# Altium PCB PortSwitcher1D.PCBDOC (part 4 of 4)
Units mil, origin at the board's own origin, x right, y up, seen from the top; angles counter-clockwise.
Board outline 6005.03 x 6005.03 mil, 4 copper layers (Top Layer, InternalPlane1, InternalPlane2, Bottom Layer); 153 components, 325 nets, 1175 pads, 173 vias.
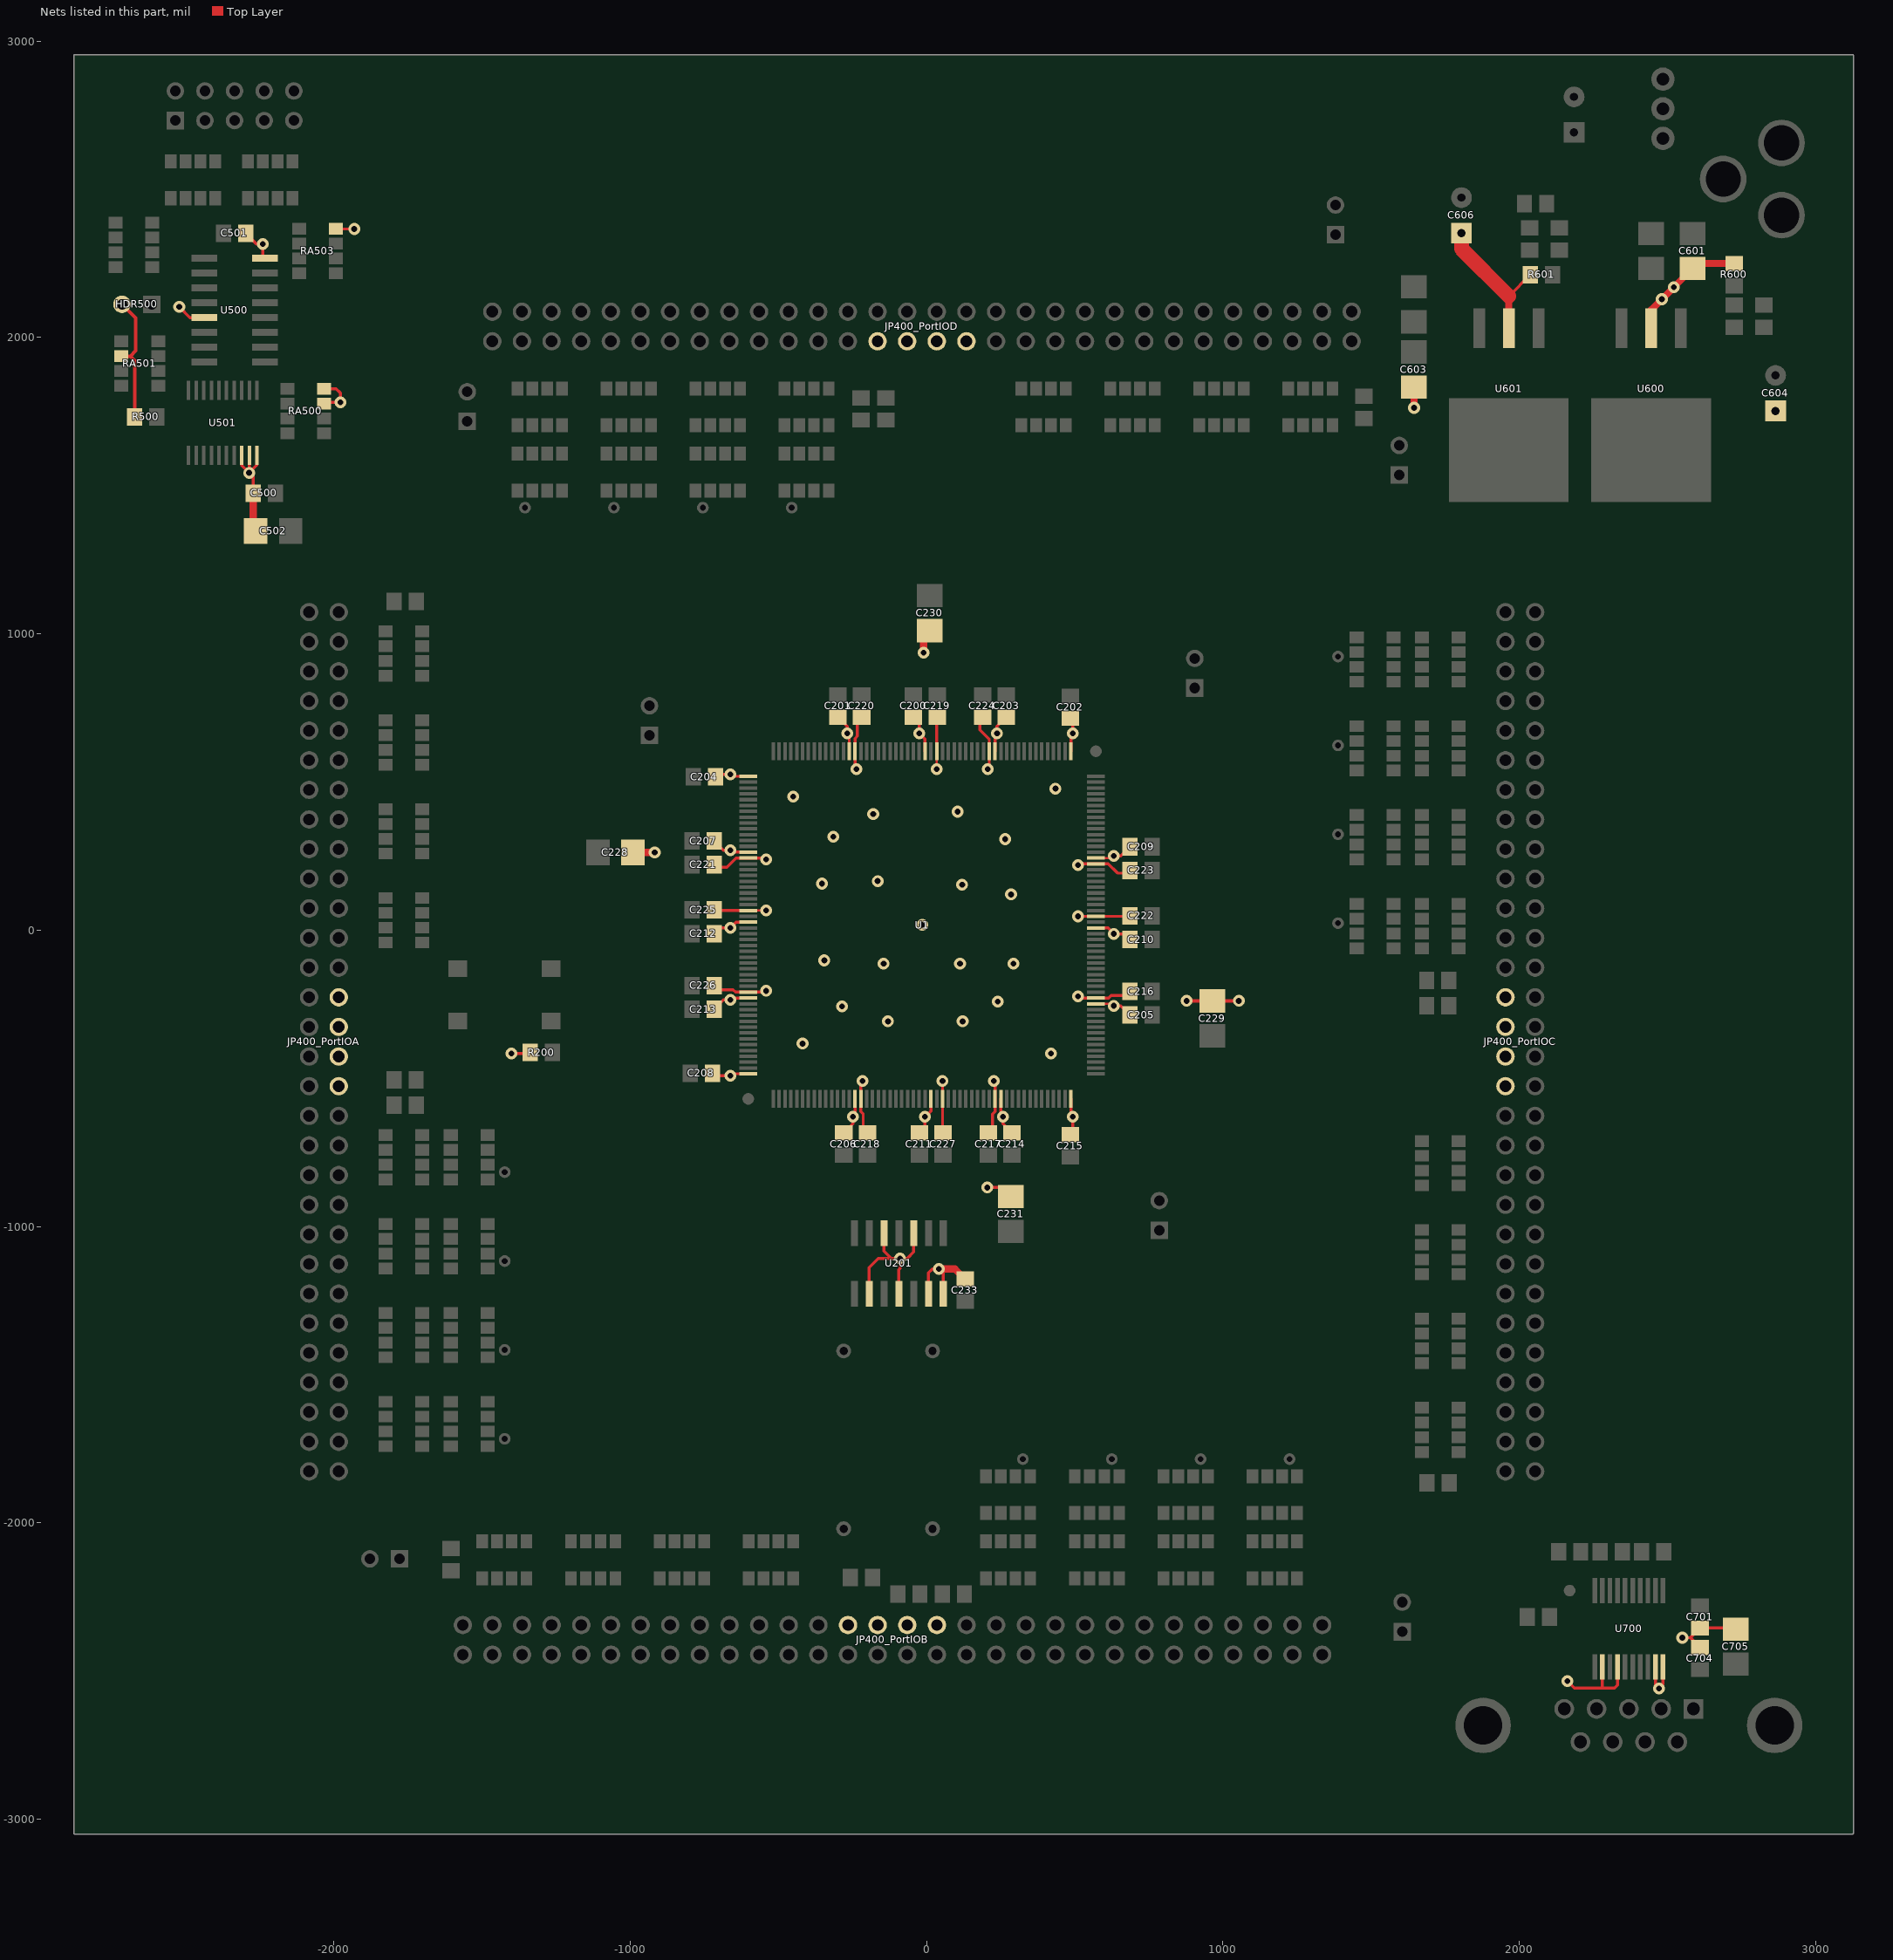
[diagram p6: the nets of this part, all layers, seen from the top]

## Via types
v1: diameter 40, hole 19.68, Top Layer to Bottom Layer, 173 vias

## Nets (pads, with @x,y where several pads share a name; then routed paths per layer and width w, separated by ;. In a path a pad name is that pad's centre, name@x,y a point inside that pad or via, vN(x,y) a via of type N, cw(c..) or ccw(c..) an arc to the next point about the centre after c; other vN are vias at no path point) (continued)
VCCINT: C216.1 C217.1 C218.1 C219.1 C220.1 C221.1 C222.2 C223.2 C224.2 C225.2 C226.2 C227.2 C230.1 C231.1 C603.1 C606.1 R601.2 U1.14 U1.28 U1.37 U1.67 U1.76 U1.90 U1.119 U1.128 U1.142 U1.172 U1.186 U1.195 U601.2 | length 4663.1
  Top Layer w8: U1.128@-601.88,66.5 v1(-541.37,66.5) U1.128@-601.88,66.5 ; v1(33.95,543.45) U1.76@33.95,603.91 v1(33.95,543.45) ; U1.186@53.63,-569.32 v1(53.63,-508.81) U1.186@53.63,-569.32 ; v1(510.84,46.82) U1.28@571.35,46.82 v1(510.84,46.82)
  Top Layer w10: C226.2@-717.86,-172.71 C226.2@-717.86,-177.12 ; C221.1@-712.86,212.29 -674.55,212.29 -643.17,243.67 ; C220.1@-205.26,719.89 C220.1@-209.67,719.89 ; C218.1@-185.58,-685.31 C218.1@-189.99,-685.31 ; C224.2@179.74,714.89 179.74,676.58 211.11,645.2 ; C217.1@194.42,-685.31 198.83,-685.31 C217.1@204.13,-680.01 ; v1(204.22,-868.54) 254.62,-868.53 C231.1@284.74,-898.65 ; C223.2@682.33,192.61 644.02,192.61 612.64,223.99 ; C216.1@687.33,-192.39 C216.1@687.33,-196.8 ; 1964.74,2139.69 R601.2@2037.33,2212.29 ; C226.2@-717.86,-177.12 C226.2@-712.57,-182.41 ; C226.2@-717.86,-177.12 C226.2@-712.57,-182.41 ; C226.2@-712.57,-182.41 C226.2@-693.89,-201.09 ; C226.2@-712.57,-182.41 C226.2@-693.89,-201.09 ; C225.2@-710.36,74.79 C225.2@-702.07,66.5 ; C225.2@-710.36,74.79 -717.86,82.29 C225.2@-710.36,74.79 ; C225.2@-710.36,74.79 C225.2@-702.07,66.5 ; C225.2@-702.07,66.5 U1.128@-601.88,66.5 C225.2@-702.07,66.5 ; C226.2@-693.89,-201.09 -652.88,-201.09 -644.89,-209.09 ; -644.89,-209.09 U1.142@-601.88,-209.09 ; -644.89,-209.09 U1.142@-601.88,-209.09 ; -643.17,243.67 U1.119@-601.88,243.67 ; -643.17,243.67 U1.119@-601.88,243.67 ; U1.142@-601.88,-209.09 v1@-545.8,-209.09 ; U1.142@-601.88,-209.09 v1@-545.8,-209.09 ; U1.119@-601.88,243.67 v1@-546.61,243.67 ; U1.119@-601.88,243.67 v1@-546.61,243.67 ; v1@-546.61,243.67 v1(-541.39,238.45) v1@-546.61,243.67 ; v1@-545.8,-209.09 v1(-541.39,-204.68) v1@-545.8,-209.09 ; v1@-241.64,547.83 v1(-237.23,543.42) v1@-241.64,547.83 ; v1@-241.64,547.83 U1.90@-241.64,603.91 ; v1@-241.64,547.83 U1.90@-241.64,603.91 ; U1.90@-241.64,603.91 -241.64,646.92 ; U1.90@-241.64,603.91 -241.64,646.92 ; -241.64,646.92 -233.65,654.91 C220.1@-233.65,695.91 ; C220.1@-233.65,695.91 C220.1@-214.97,714.59 ; C220.1@-233.65,695.91 C220.1@-214.97,714.6 ; -221.96,-612.34 -213.96,-620.33 -213.96,-661.33 -199.58,-675.72 C218.1@-195.28,-680.01 ; -221.96,-612.34 U1.172@-221.96,-569.32 ; -221.96,-612.34 U1.172@-221.96,-569.32 ; U1.172@-221.96,-569.32 v1@-221.96,-514.05 ; U1.172@-221.96,-569.32 v1@-221.96,-514.05 ; v1@-221.96,-514.05 v1(-216.74,-508.83) v1@-221.96,-514.05 ; C220.1@-214.97,714.59 C220.1@-209.67,719.89 ; C220.1@-214.97,714.6 C220.1@-209.67,719.89 ; C218.1@-195.28,-680.01 C218.1@-189.99,-685.31 ; C218.1@-195.28,-680.01 C218.1@-189.99,-685.31 ; C219.1@33.95,704.1 U1.76@33.95,603.91 C219.1@33.95,704.1 ; C219.1@33.95,704.1 C219.1@42.24,712.39 ; C219.1@33.95,704.1 C219.1@42.24,712.39 ; C219.1@42.24,712.39 49.74,719.89 C219.1@42.24,712.39 ; C227.2@53.63,-669.52 55.42,-671.31 C227.2@61.92,-677.81 ; C227.2@53.63,-669.52 U1.186@53.63,-569.32 C227.2@53.63,-669.52 ; C227.2@53.63,-669.52 C227.2@61.92,-677.81 ; C227.2@61.92,-677.81 69.42,-685.31 C227.2@61.92,-677.81 ; C217.1@204.13,-680.01 208.42,-675.72 C217.1@222.81,-661.33 ; C217.1@204.13,-680.01 C217.1@222.81,-661.33 ; v1@211.11,548.64 v1(205.89,543.42) v1@211.11,548.64 ; v1@211.11,548.64 U1.67@211.11,603.91 ; v1@211.11,548.64 U1.67@211.11,603.91 ; U1.67@211.11,603.91 211.11,645.2 ; U1.67@211.11,603.91 211.11,645.2 ; C217.1@222.81,-661.33 222.81,-620.33 230.8,-612.34 ; 230.8,-612.34 U1.195@230.8,-569.32 ; 230.8,-612.34 U1.195@230.8,-569.32 ; U1.195@230.8,-569.32 v1@230.8,-513.24 ; U1.195@230.8,-569.32 v1@230.8,-513.24 ; v1@230.8,-513.24 v1(226.39,-508.83) v1@230.8,-513.24 ; v1@515.27,223.98 v1(510.86,219.57) v1@515.27,223.98 ; v1@515.27,223.98 U1.37@571.35,223.98 ; v1@515.27,223.98 U1.37@571.35,223.98 ; v1@516.08,-228.77 v1(510.86,-223.55) v1@516.08,-228.77 ; v1@516.08,-228.77 U1.14@571.35,-228.77 ; v1@516.08,-228.77 U1.14@571.35,-228.77 ; U1.14@571.35,-228.77 614.36,-228.77 ; U1.14@571.35,-228.77 614.36,-228.77 ; U1.37@571.35,223.98 612.64,223.99 ; U1.37@571.35,223.98 612.64,223.99 ; 614.36,-228.77 622.36,-220.78 C216.1@663.36,-220.78 ; C216.1@663.36,-220.78 C216.1@682.04,-202.1 ; C216.1@663.36,-220.78 C216.1@682.04,-202.1 ; C216.1@682.04,-202.1 C216.1@687.33,-196.8 ; C216.1@682.04,-202.1 C216.1@687.33,-196.8 ; U1.28@571.35,46.82 671.55,46.82 U1.28@571.35,46.82
  Top Layer w24: v1(-10.34,936.35) -10.34,1013.16 C230.1@-10.26,1013.24 ; v1(1644.74,1762.91) C603.1@1644.74,1833.24 ; U601.2@1964.74,2032.29 1964.74,2139.69
  Top Layer w50: C606.1@1804.74,2352.29 1804.74,2299.69 1964.74,2139.69
  other v1: 419.74,-415.67 -418.7,-382.71 -130.39,-307.71 121.51,-307.71 -285.26,-257.24 239.74,-240.52 -145.15,-112.71 112.66,-112.71 292.73,-112.71 -345.26,-101.77 -15.26,18.28 284.74,120.61 119.74,153.08 -352.78,157.29 -165.26,165.88 265.18,307.29 -315.26,315.44 -180.26,392.2 104.74,400.07 -450.26,451.24 434.74,477.8
VCCO: C200.1 C201.1 C202.1 C203.1 C204.1 C205.1 C206.1 C207.1 C208.2 C209.2 C210.2 C211.2 C212.2 C213.2 C214.2 C215.2 C228.1 C229.1 C233.1 C500.1 C501.1 C502.1 C601.1 C604.1 C701.1 C704.1 C705.1 HDR500.2 JP400_PortIOA.28 JP400_PortIOA.30 JP400_PortIOA.32 JP400_PortIOA.34 JP400_PortIOB.28 JP400_PortIOB.30 JP400_PortIOB.32 JP400_PortIOB.34 JP400_PortIOC.28 JP400_PortIOC.30 JP400_PortIOC.32 JP400_PortIOC.34 JP400_PortIOD.28 JP400_PortIOD.30 JP400_PortIOD.32 JP400_PortIOD.34 pad.0 R200.2 R500.1 R600.2 RA500.7 RA500.8 RA501.6 RA503.8 U1.13 U1.26 U1.38 U1.53 U1.66 U1.78 U1.91 U1.105 U1.118 U1.130 U1.143 U1.156 U1.171 U1.184 U1.196 U1.208 U201.3 U201.5 U201.9 U201.11 U201.13 U201.14 U500.5 U500.16 U501.18 U501.19 U501.20 U600.2 U700.12 U700.14 U700.19 U700.20 | length 7901
  Top Layer w8: v1@-254.28,-632.31 -250.07,-628.1 v1@-244.28,-622.31 ; -241.64,-604.68 U1.171@-241.64,-569.32 ; v1@253.12,-622.31 v1@258.91,-628.1 ; v1@-660.65,-237.19 -661.17,-237.71 -662.39,-238.93 -664.22,-240.76 -664.87,-241.41 v1@-660.65,-237.19 ; v1@-660.65,-237.19 -654.87,-231.41 v1@-660.65,-237.19 ; v1@-269.75,662.68 -263.97,656.9 v1@-269.75,662.68 ; v1@-269.75,662.68 -273.97,666.9 v1@-269.75,662.68 ; v1@258.91,-628.1 263.12,-632.31 v1@258.91,-628.1 ; v1@625.18,-248.46 U1.13@571.35,-248.46 v1@625.18,-248.46 ; v1@625.18,-248.46 631.86,-248.46 v1@625.18,-248.46 ; v1@625.18,243.67 U1.38@571.35,243.67 v1@625.18,243.67 ; v1@625.18,243.67 631.86,243.67 v1@625.18,243.67 ; v1@630.12,-256.88 634.34,-261.09 v1@630.12,-256.88 ; v1@630.12,-256.88 626.74,-253.49 624.34,-251.09 v1@630.12,-256.88 ; -637.23,-228.77 U1.143@-601.88,-228.77 -637.23,-228.77 ; U1.91@-261.33,603.91 -261.33,639.26 U1.91@-261.33,603.91
  Top Layer w10: v1(-2521.99,2103.79) -2485.49,2067.29 U500.5@-2437.63,2067.29 ; U501.18@-2311.29,1603.04 -2311.29,1568.43 v1(-2286.34,1543.48) ; C501.1@-2297.86,2352.29 -2261.49,2315.92 v1(-2240.09,2315.92) -2240.09,2274.48 U500.16@-2232.9,2267.29 ; U501.19@-2285.7,1603.04 v1@-2285.7,1544.11 ; C500.1@-2272.67,1475.08 -2272.67,1529.81 v1(-2286.34,1543.48) ; U501.20@-2260.11,1603.04 -2260.11,1569.71 v1@-2285.7,1544.11 ; RA500.8@-2033.26,1827.29 -1992.54,1827.29 -1978.34,1813.09 v1(-1978.34,1781.6) RA500.7@-2028.95,1781.6 ; RA503.8@-1992.49,2366.52 v1(-1931.59,2366.52) ; v1(-1401.22,-416.23) -1341.19,-416.23 R200.2@-1337.67,-412.71 ; C206.1@-279.58,-684.31 -248.33,-653.05 v1(-248.33,-629.83) -241.64,-623.15 U1.171@-241.64,-569.32 ; U201.9@-194,-1226.8 -194,-1138.56 -162.86,-1107.42 -65.45,-1107.42 -44,-1085.98 U201.3@-44,-1022.08 ; U201.5@-144,-1022.08 -144,-1082.98 -119.57,-1107.42 ; U201.11@-94,-1226.8 -94,-1145.82 -90.05,-1141.86 pad.0@-90.05,-1107.42 ; U201.13@6,-1226.8 6,-1157.01 19.86,-1143.14 v1(40.84,-1143.14) 56,-1158.3 U201.14@56,-1226.8 ; v1(2161.85,-2533.8) 2185.46,-2557.42 2321.26,-2557.42 2331.35,-2547.32 U700.14@2331.35,-2486.65 ; 2280.17,-2557.18 U700.12@2280.17,-2486.65 ; U700.19@2459.3,-2486.65 2459.3,-2546.82 v1(2471.3,-2558.82) 2484.89,-2545.23 U700.20@2484.89,-2486.65 ; v1(2550.02,-2387.6) 2577.24,-2387.6 C701.1@2609.74,-2355.11 2726.19,-2355.11 C705.1@2729.74,-2358.65 ; 2577.03,-2387.6 C704.1@2609.74,-2420.31 ; v1(-2286.34,1543.48) v1@-2285.7,1544.11 ; C204.1@-717.86,522.29 -722.86,517.29 C204.1@-717.86,522.29 ; C204.1@-717.86,522.29 C204.1@-714.21,525.94 ; C204.1@-717.86,522.29 C204.1@-714.21,525.94 ; C208.2@-714.21,-491.36 C208.2@-722.86,-482.71 C208.2@-714.21,-491.36 ; C208.2@-714.21,-491.36 -669.92,-491.36 v1(-662.39,-491.36) ; C208.2@-714.21,-491.36 v1(-662.39,-491.36) ; C204.1@-714.21,525.94 C204.1@-712.86,525.94 ; C204.1@-714.21,525.94 C204.1@-712.86,525.94 ; C204.1@-712.86,525.94 -666.61,525.94 v1(-662.39,525.94) ; C204.1@-712.86,525.94 v1(-662.39,525.94) ; C212.2@-697.7,7.45 -706.06,-0.91 C212.2@-716.86,-11.71 C212.2@-697.7,7.45 ; C212.2@-697.7,7.45 -688.11,7.45 v1(-662.39,7.45) ; C212.2@-697.7,7.45 v1(-662.39,7.45) ; -685.61,-235.46 C213.2@-716.86,-266.71 -685.61,-235.46 ; -685.61,-235.46 -667.26,-235.46 v1(-662.39,-235.46) ; -685.61,-235.46 v1(-662.39,-235.46) ; -685.61,270.04 -673.26,270.04 -664.01,270.04 v1(-662.39,270.04) ; -685.61,270.04 C207.1@-716.86,301.29 -685.61,270.04 ; -685.61,270.04 v1(-662.39,270.04) ; v1(-662.39,-491.36) v1@-655.71,-484.68 ; v1(-662.39,-491.36) v1@-655.71,-484.68 ; v1(-662.39,-235.46) v1@-655.71,-228.77 ; v1(-662.39,-235.46) v1@-655.71,-228.77 ; v1(-662.39,7.45) -642.71,27.13 ; v1(-662.39,7.45) -642.71,27.13 ; v1(-662.39,270.04) v1@-655.71,263.35 ; v1(-662.39,270.04) v1@-655.71,263.35 ; v1(-662.39,525.94) v1@-655.71,519.26 ; v1(-662.39,525.94) v1@-655.71,519.26 ; v1@-655.71,-484.68 U1.156@-601.88,-484.68 v1@-655.71,-484.68 ; v1@-655.71,-228.77 U1.143@-601.88,-228.77 v1@-655.71,-228.77 ; v1@-655.71,263.35 U1.118@-601.88,263.35 v1@-655.71,263.35 ; v1@-655.71,519.26 U1.105@-601.88,519.26 v1@-655.71,519.26 ; -642.71,27.13 U1.130@-601.88,27.13 -642.71,27.13 ; v1(-268.01,664.42) v1@-261.33,657.73 ; v1(-268.01,664.42) -268.01,687.64 ; v1(-268.01,664.42) -268.01,687.64 ; v1(-268.01,664.42) v1@-261.33,657.73 ; -268.01,687.64 C201.1@-299.26,718.89 -268.01,687.64 ; v1@-261.33,657.73 U1.91@-261.33,603.91 v1@-261.33,657.73 ; v1(-25.11,664.42) -5.42,644.73 ; v1(-25.11,664.42) -25.11,666.98 C200.1@-25.11,699.73 ; v1(-25.11,664.42) C200.1@-25.11,699.73 ; v1(-25.11,664.42) -5.42,644.73 ; C200.1@-25.11,699.73 C200.1@-44.26,718.89 C200.1@-25.11,699.73 ; C211.2@-5.42,-665.15 -6.62,-666.35 C211.2@-24.58,-684.31 C211.2@-5.42,-665.15 ; C211.2@-5.42,-665.15 -5.42,-653.71 -5.42,-639.86 v1(-5.42,-629.83) ; C211.2@-5.42,-665.15 v1(-5.42,-629.83) ; v1(-5.42,-629.83) 14.26,-610.15 ; v1(-5.42,-629.83) 14.26,-610.15 ; -5.42,644.73 U1.78@-5.42,603.91 -5.42,644.73 ; 14.26,-610.15 U1.184@14.26,-569.32 14.26,-610.15 ; v1@230.8,657.73 U1.66@230.8,603.91 v1@230.8,657.73 ; v1@230.8,657.73 v1(237.48,664.42) ; v1@230.8,657.73 v1(237.48,664.42) ; v1(237.48,664.42) 237.48,666.04 237.48,675.29 237.48,687.64 ; v1(237.48,664.42) 237.48,687.64 ; 237.48,687.64 C203.1@268.74,718.89 237.48,687.64 ; v1@250.49,-623.15 v1(257.17,-629.83) ; v1@250.49,-623.15 U1.196@250.48,-569.32 v1@250.49,-623.15 ; v1@250.49,-623.15 v1(257.17,-629.83) ; 257.17,-653.05 260.17,-656.06 C214.2@288.42,-684.31 257.17,-653.05 ; 257.17,-653.05 257.17,-642.71 257.17,-634.14 v1(257.17,-629.83) ; 257.17,-653.05 v1(257.17,-629.83) ; v1@486.7,-623.15 486.7,-600.68 U1.208@486.7,-569.32 v1@486.7,-623.15 ; v1@486.7,-623.15 v1(493.39,-629.83) ; v1@486.7,-623.15 v1(493.39,-629.83) ; v1@486.7,657.73 486.7,641.32 U1.53@486.7,603.91 v1@486.7,657.73 ; v1@486.7,657.73 v1(493.39,664.42) ; v1@486.7,657.73 v1(493.39,664.42) ; C202.1@489.74,719.89 C202.1@493.39,716.24 ; C202.1@489.74,719.89 484.74,724.89 C202.1@489.74,719.89 ; C202.1@489.74,719.89 C202.1@493.39,716.24 ; C215.2@493.39,-681.65 C215.2@484.74,-690.31 C215.2@493.39,-681.65 ; C215.2@493.39,-681.65 v1(493.39,-629.83) ; C215.2@493.39,-681.65 v1(493.39,-629.83) ; v1(493.39,664.42) C202.1@493.39,714.89 ; v1(493.39,664.42) C202.1@493.39,714.89 ; C202.1@493.39,714.89 C202.1@493.39,716.24 ; C202.1@493.39,714.89 C202.1@493.39,716.24 ; 612.18,7.45 U1.26@571.35,7.45 612.18,7.45 ; 612.18,7.45 v1(631.86,-12.23) ; 612.18,7.45 v1(631.86,-12.23) ; v1(631.86,-255.14) 625.18,-248.46 v1(631.86,-255.14) ; v1(631.86,-255.14) 636.74,-255.14 655.08,-255.14 ; v1(631.86,-255.14) 655.08,-255.14 ; v1(631.86,-12.23) C210.2@667.18,-12.23 ; v1(631.86,-12.23) C210.2@667.18,-12.23 ; v1(631.86,250.35) 625.18,243.67 v1(631.86,250.35) ; v1(631.86,250.35) 655.08,250.35 ; v1(631.86,250.35) 655.08,250.35 ; 655.08,-255.14 C205.1@686.33,-286.39 655.08,-255.14 ; 655.08,250.35 C209.2@686.33,281.61 655.08,250.35 ; C210.2@667.18,-12.23 C210.2@686.33,-31.39 C210.2@667.18,-12.23
  Top Layer w12: RA501.6@-2717.26,1937.29 -2687.51,1937.29 ; HDR500.2@-2715.26,2112.29 -2668.61,2065.63 -2668.61,1956.19 -2687.51,1937.29 ; R500.1@-2672.67,1732.29 -2672.67,1922.45 -2687.51,1937.29 ; v1(877.03,-238.55) v1(1053.36,-238.55)
  Top Layer w24: C500.1@-2272.67,1475.08 -2272.67,1355.64 C502.1@-2264.32,1347.29 ; C228.1@-991.21,262.29 v1(-917.59,262.31) ; v1(40.84,-1143.14) 95.54,-1143.14 C233.1@130,-1177.6 ; U600.2@2444.74,2032.29 2444.74,2093.24 C601.1@2584.74,2233.24 2601.19,2249.69 R600.2@2724.74,2249.69
  other v1: 2480.94,2129.45 2521.08,2169.58
pads on no net: J700.9 RA500.3 RA500.4 RA500.5 RA500.6 RA502.1 RA502.8 RA503.4 RA503.5 U200.1 U201.4 U201.6 U201.8 U201.10 U201.12 U501.2 U501.9 U501.12 U501.13 U501.14 U501.15 U501.16 U600.4 U601.4 U700.1 U700.10 U700.11

## Polygon pours and split planes (outlines as drawn)
VCCINT on Top Layer "Top Layer-VCCINT" (solid, remove dead copper, pour order 1000): -637.15,622.45 -639.12,-560.32 583.01,-562.71 584.98,56.65 588.91,622.29
VCCINT on Bottom Layer "Bottom Layer-VCCINT" (solid, remove dead copper, pour order 1001): -1321.03,1118.39 -1321.03,-1654.52 1567.99,-1654.52 1567.99,987.52 1830.72,1250.24 2210.54,1630.07 2210.54,2421.2 1966.51,2665.24 1648.68,2665.24 1516.82,2533.38 1516.82,1851.47 1181.28,1515.92 -0.5,1515.92 -395.09,1121.34 -1321.03,1121.34
GND on InternalPlane1 (split plane): 3087.8,-3010.77 -2838.33,-3010.77 -2838.33,2915.35 3087.8,2915.35
VCCO on InternalPlane2 (split plane): 3087.8,-3010.77 -2838.33,-3010.77 -2838.33,2915.35 3087.8,2915.35

## Other copper
Top Layer:
  text "1" at -2328.07,-2734.45 h60
Bottom Layer:
  text "4" at -2123.07,-2734.45 h60
InternalPlane1 (plane layer: these items are gaps in the copper):
  rectangle: -2353.07,-2744.45 -2288.07,-2664.45
  rectangle: -2213.07,-2744.45 -2063.07,-2664.45
  text "2" at -2273.07,-2734.45 h60
InternalPlane2 (plane layer: these items are gaps in the copper):
  rectangle: -2353.07,-2744.45 -2213.07,-2664.45
  rectangle: -2138.07,-2744.45 -2063.07,-2664.45
  text "3" at -2193.07,-2734.45 h60

## Silkscreen, mask and mechanical layers (free items; w line width, h text height)
Top Overlay:
  text "Programming/Debug" at -1947.34,2763.07 h60
  text "Port D" at -232.73,2158.35 h60
  text "15" at -807.26,2140.85 h45
  text "5" at -1283.51,2138.88 h45
  text "55" at 1195.18,2138.88 h45
  text "35" at 193.47,2136.91 h45
  text "45" at 694.33,2136.91 h45
  text "10" at -1034.56,1947.99 h45 r180
  text "20" at -523.87,1940.11 h45 r180
  text "30" at -30.88,1939.13 h45 r180
  text "40" at 473.91,1939.13 h45 r180
  text "50" at 970.83,1939.13 h45 r180
  text "5" at 2104.75,891.45 h45 r270
  text "55" at -2135.28,834.43 h45 r90
  text "10" at 1913.85,642.5 h45 r90
  text "50" at -1935.53,610.08 h45 r270
  text "15" at 2106.72,415.19 h45 r270
  text "45" at -2133.31,333.58 h45 r90
  text "20" at 1905.98,131.8 h45 r90
  text "40" at -1935.53,113.16 h45 r270
  text "Rev 1.1" at -2738.47,5.91 h45 r90
  text "Port C" at 2124.22,-159.33 h60 r270
  text "35" at -2133.31,-167.28 h45 r90
  text "Reset" at -1236.89,-239.11 h60
  text "30" at 1905,-361.18 h45 r90
  text "30" at -1935.53,-391.63 h45 r270
  text "35" at 2102.78,-585.54 h45 r270
  text "Port A" at -2154.75,-593.48 h60 r90
  text "40" at 1905,-865.98 h45 r90
  text "20" at -1936.51,-884.62 h45 r270
  text "EL 2003-2004 Altium Ltd" at -2664.67,-926.93 h45 r90
  text "PortSwitcher" at -2745.36,-930.86 h45 r90
  text "45" at 2102.78,-1086.39 h45 r270
  text "15" at -2137.25,-1168.01 h45 r90
  text "50" at 1905,-1362.9 h45 r90
  text "10" at -1944.38,-1395.31 h45 r270
  text "55" at 2104.75,-1587.25 h45 r270
  text "5" at -2135.28,-1644.26 h45 r90
  text "50" at -1101.75,-2296.67 h45
  text "40" at -604.83,-2296.67 h45
  text "30" at -100.04,-2296.67 h45
  text "20" at 392.94,-2297.66 h45
  text "10" at 903.64,-2305.53 h45
  text "45" at -825.25,-2494.46 h45 r180
  text "35" at -324.39,-2494.46 h45 r180
  text "55" at -1326.11,-2496.42 h45 r180
  text "5" at 1152.59,-2496.42 h45 r180
  text "15" at 676.33,-2498.39 h45 r180
  text "Port B" at 101.81,-2515.9 h60 r180
Bottom Overlay:
  text "Port D" at 100.97,2149.71 h60
  text "PORT A" at -2146.1,-259.78 h60 r90
  text "Port C" at 2115.57,-493.04 h60 r270
  text "Port B" at -231.9,-2507.25 h60 r180
Board Outline:
  lines w5: -2875.26,-3047.71 3124.74,-3047.71 3124.74,2952.29 -2875.26,2952.29 -2875.26,-3047.71

## Text inside footprints (layer, text, board x,y; h text height)
HDR501: Top Overlay "10" at -2070.26,2812.29 h39.37; Top Overlay "9" at -2070.26,2712.29 h39.37; Top Overlay "1" at -2615.26,2712.29 h39.37; Top Overlay "2" at -2630.26,2812.29 h39.37
J700: Top Overlay "6" at 2544.74,-2782.71 h39.37 r180; Top Overlay "9" at 2214.74,-2782.71 h39.37 r180; Top Overlay "5" at 2149.74,-2672.71 h39.37 r180; Top Overlay "1" at 2604.74,-2672.71 h39.37 r180
JP400_PortIOA: Top Overlay "1" at -2103.77,-1886.41 h50 r270; Bottom Overlay "60" at -2003.77,1153.59 h50 r270; Bottom Overlay "59" at -2103.77,1153.59 h50 r270; Bottom Overlay "1" at -2103.77,-1926.41 h50 r270; Bottom Overlay "2" at -2003.77,-1926.41 h50 r270
JP400_PortIOB: Top Overlay "1" at 1394.74,-2464.91 h50; Bottom Overlay "2" at 1434.74,-2364.91 h50; Bottom Overlay "1" at 1434.74,-2464.91 h50; Bottom Overlay "59" at -1645.26,-2464.91 h50; Bottom Overlay "60" at -1645.26,-2364.91 h50
JP400_PortIOC: Top Overlay "1" at 2073.24,1133.59 h50 r90; Bottom Overlay "60" at 1973.24,-1906.41 h50 r90; Bottom Overlay "59" at 2073.24,-1906.41 h50 r90; Bottom Overlay "1" at 2073.24,1173.59 h50 r90; Bottom Overlay "2" at 1973.24,1173.59 h50 r90
JP400_PortIOD: Top Overlay "1" at -1525.66,2107.37 h50 r180; Bottom Overlay "60" at 1413.97,1923.73 h50 r180; Bottom Overlay "59" at 1413.97,2198.88 h50 r180; Bottom Overlay "1" at -1565.66,2107.37 h50 r180; Bottom Overlay "2" at -1565.66,2007.37 h50 r180
U600: Top Overlay "1" at 2554.58,1950.6 h31.5 r180; Top Overlay "3" at 2364.74,1950.6 h31.5 r180; Top Overlay "2" at 2464.74,1952.29 h31.5 r180
U601: Top Overlay "1" at 2074.58,1950.6 h31.5 r180; Top Overlay "3" at 1884.74,1950.6 h31.5 r180; Top Overlay "2" at 1984.74,1952.29 h31.5 r180